# Altium PCB PCB1.PcbDoc (part 1 of 2)
Units mm, origin at the board's own origin, x right, y up, seen from the top; angles counter-clockwise.
Board outline 42.3 x 53.8 mm, 2 copper layers (Top Layer, Bottom Layer), stack 1.571 mm thick; 73 components, 29 nets, 129 pads, 33 vias.
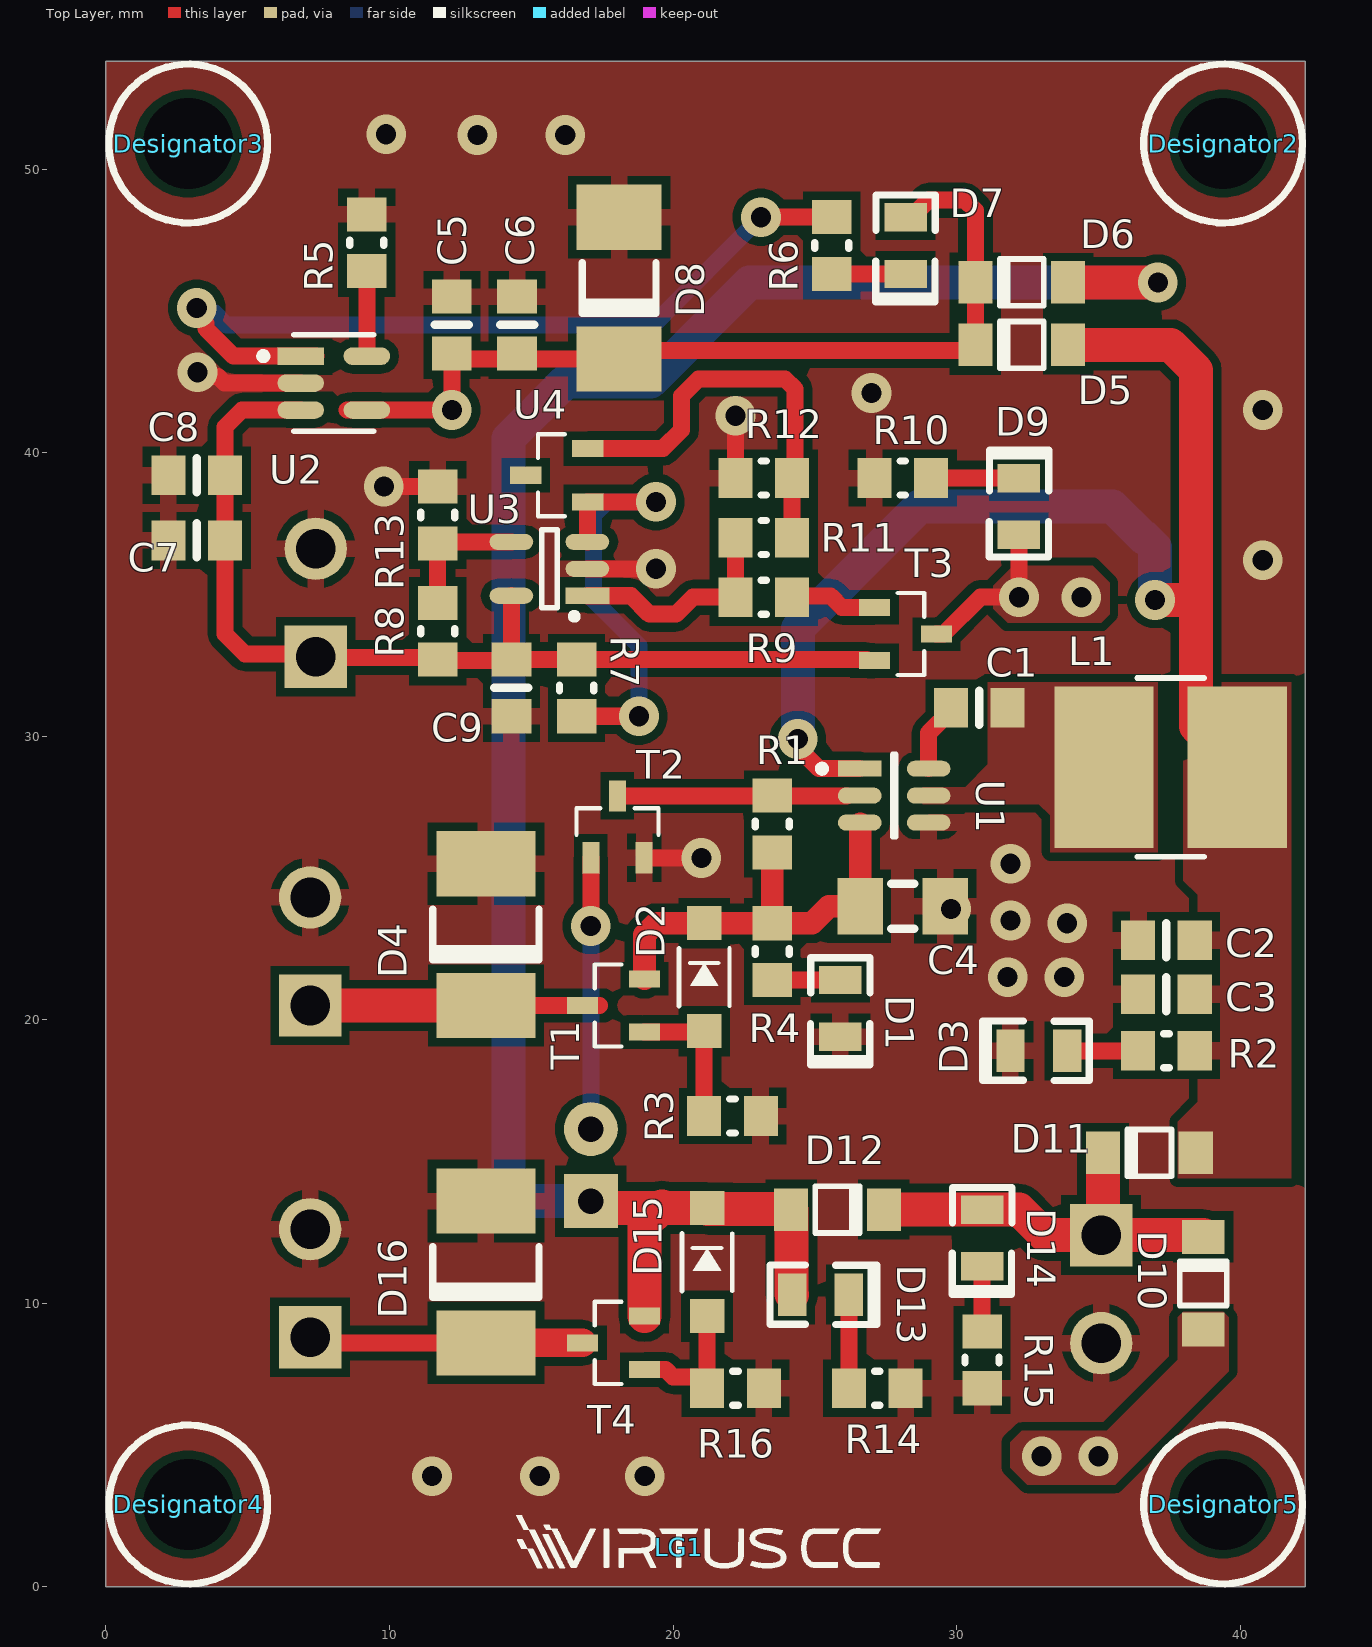
[diagram p0: Top Layer view]
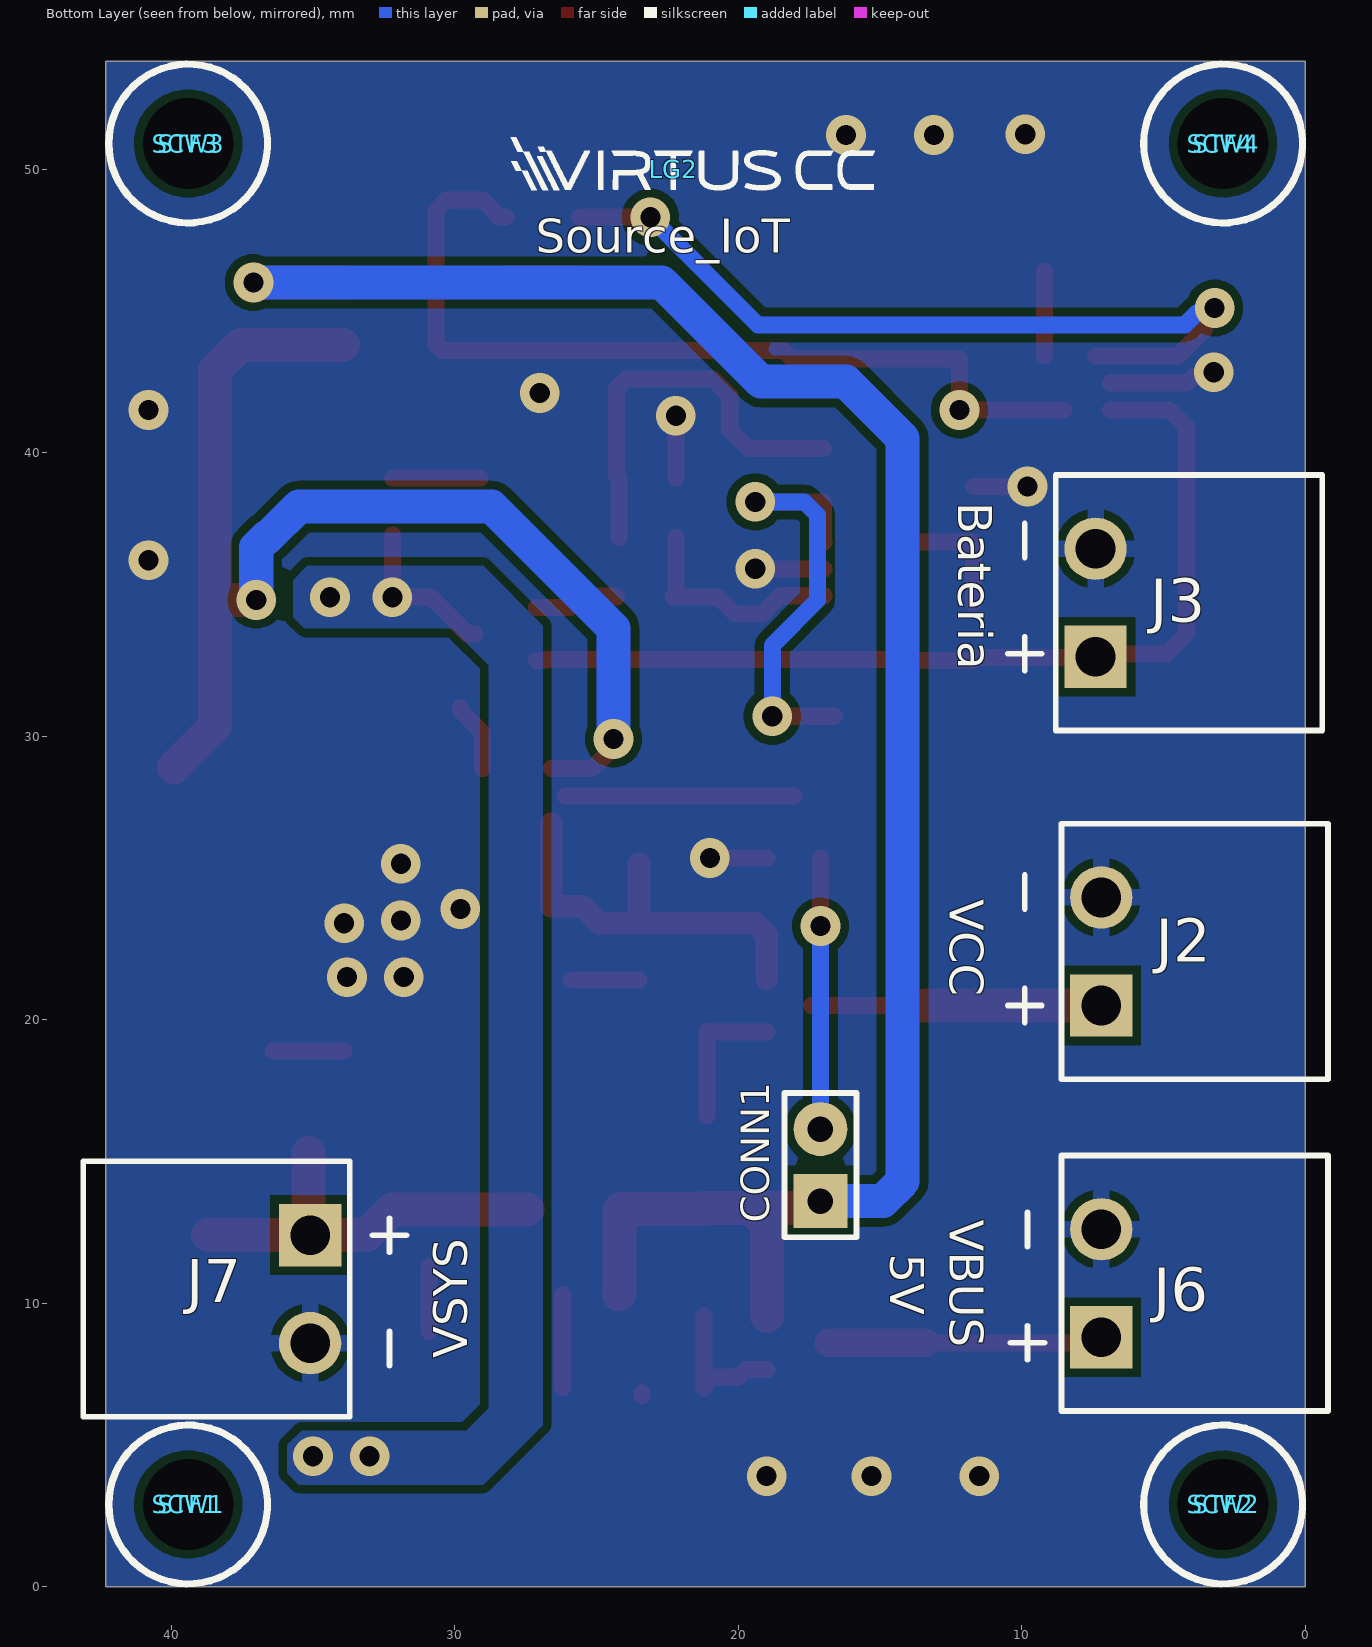
[diagram p1: Bottom Layer view, seen from below]
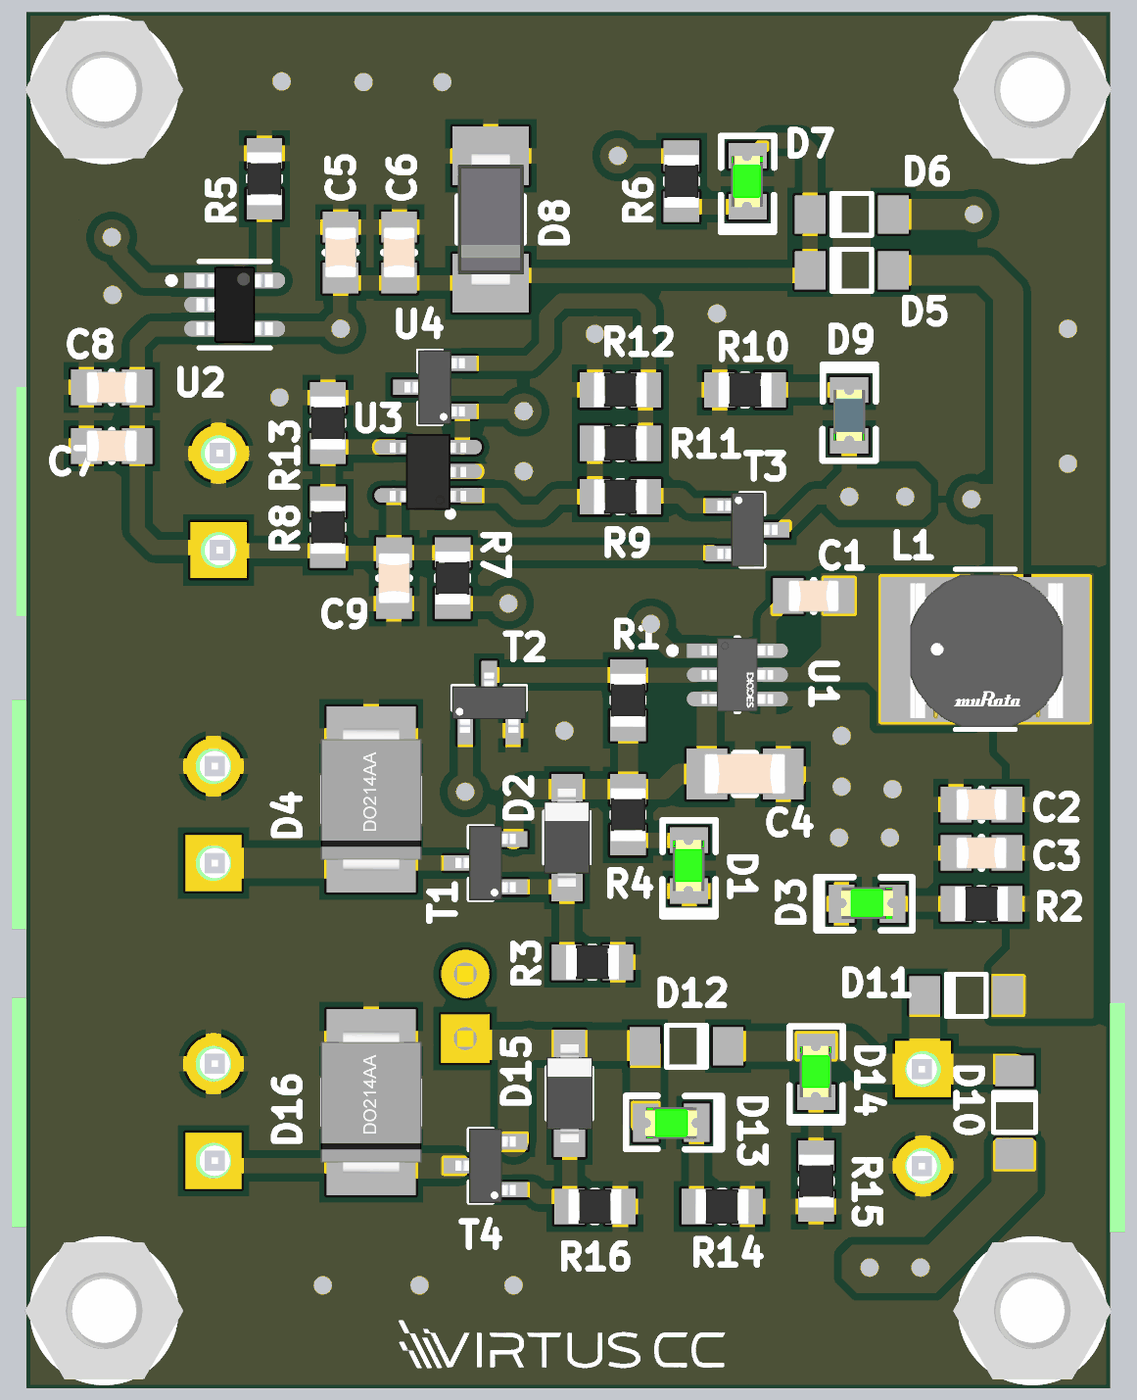
[diagram p2: 3D render of the assembled board from above, using the file's embedded part models]
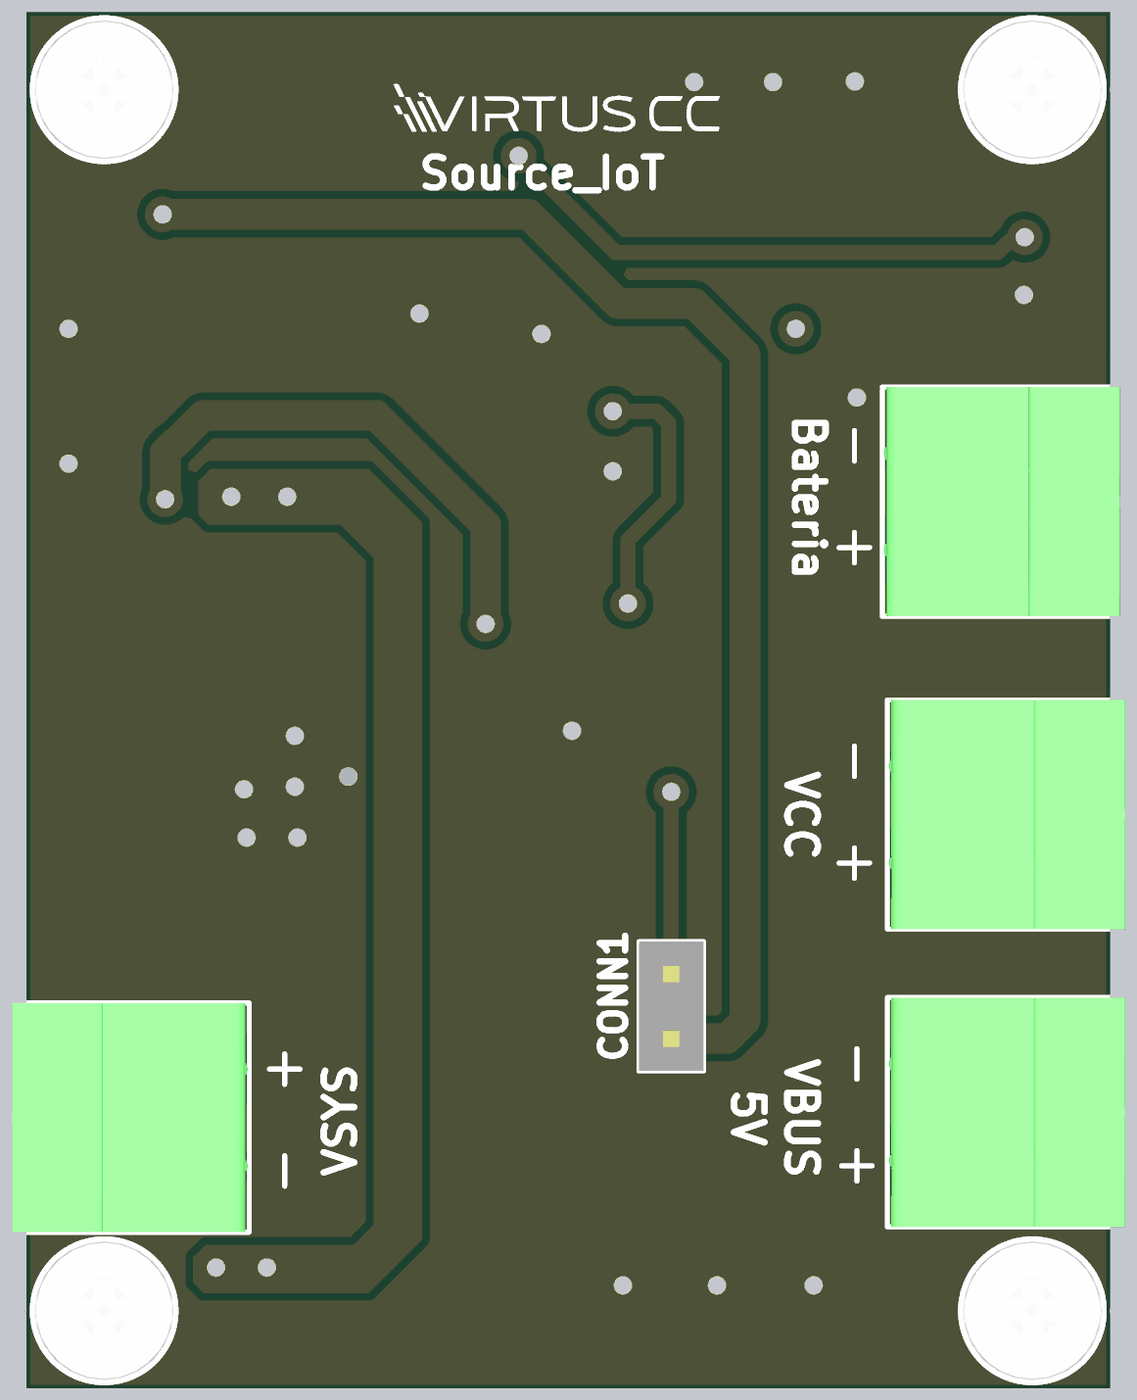
[diagram p3: 3D render of the assembled board from below, using the file's embedded part models]

## Layer stack, top to bottom
Top Solder: solder mask 0.0254, SM-003, Dk 4
Top Layer: signal copper 0.0356
Dielectric 1: dielectric 1.5, FR-4, Dk 4.8
Bottom Layer: signal copper 0.0356
Bottom Solder: solder mask 0.0254, SM-003, Dk 4

## Board outline
0,0 42.3,0 42.3,53.8 0,53.8

## Design rules (kind name [scope] priority, off if disabled: settings)
Clearance [All] p1: gap=0.3 ignorepadtopadclearanceinfootprint=FALSE
HoleSize [All] p1: absolutevalues=TRUE maxlimit=3.2 minlimit=0.025 maxpercent=80.000 minpercent=20.000
MinimumSolderMaskSliver [All] p1: minsoldermaskwidth=0.1
PolygonConnect PolygonConnect_3 [InNet('+3.7V')] p1: connectstyle=Direct reliefconductorwidth=0.254 reliefentries=4 polygonreliefangle="90 Angle" airgapwidth=0.254
PolygonConnect PolygonConnect_2 [HasFootprint('DG6045C','SOD-123F') vs InNet('+5V_Ext')] p2: connectstyle=Direct reliefconductorwidth=0.254 reliefentries=4 polygonreliefangle="90 Angle" airgapwidth=0.254
PolygonConnect PolygonConnect_1 [InNet('NetC1_2')] p3: connectstyle=Direct reliefconductorwidth=0.254 reliefentries=4 polygonreliefangle="90 Angle" airgapwidth=0.254
PolygonConnect [All] p4: thpad.connectstyle=Relief thpad.reliefconductorwidth=0.6 thpad.reliefentries=4 thpad.polygonreliefangle="90 Angle" thpad.airgapwidth=0.3 smdpad.connectstyle=Relief smdpad.reliefconductorwidth=0.6 smdpad.reliefentries=4 smdpad.polygonreliefangle="90 Angle" smdpad.airgapwidth=0.3 via.connectstyle=Direct via.reliefconductorwidth=0.6 via.reliefentries=4 via.polygonreliefangle="90 Angle" via.airgapwidth=0.3
RoutingVias [All] p1: holewidth=0.7 width=1.4 viastyle="Through Hole" minholewidth=0.7 minwidth=1.4 maxholewidth=0.7 maxwidth=1.4
SilkToSilkClearance [All] p1: silktosilkclearance=0.2
SilkToSolderMaskClearance [IsPad] p1: minsilkscreentomaskgap=0 clearancetoexposedcopper=TRUE
SolderMaskExpansion SolderMaskExpansion_1 [IsVia] p1: expansion=0.102 istentingtop=TRUE
SolderMaskExpansion [All] p2: expansion=0.102 istentingtop=FALSE
SupplyNets "Schematic Supply Nets_7" [InNet('GND')] p1: voltage=0.000
SupplyNets "Schematic Supply Nets_6" [InNet('+5V_USB')] p2: voltage=0.000
SupplyNets "Schematic Supply Nets_5" [InNet('VSYS')] p3: voltage=0.000
SupplyNets "Schematic Supply Nets_4" [InNet('+3.7V')] p4: voltage=0.000
SupplyNets "Schematic Supply Nets_3" [InNet('V_Battery')] p5: voltage=0.000
SupplyNets "Schematic Supply Nets_2" [InNet('VCC')] p6: voltage=0.000
SupplyNets "Schematic Supply Nets_1" [InNet('+5V_Ext')] p7: voltage=0.000
SupplyNets "Schematic Supply Nets" [InNet('VBUS')] p8: voltage=0.000
Width [All] p1: maxlimit=2 minlimit=0.3 preferedwidth=0.6
26 further rules are at their usual default settings.

## Classes and differential pairs
component class Mecânica: LG1 LG2 SCW1 SCW2 SCW3 SCW4 STF1 STF2 STF3 STF4

## Components (designator, comment, footprint, x,y, rotation, side; value= is the part's Value field where it differs from the comment)
C1 "CL21B104KACNNNC" C-0805 30.8,31 r0 top value=100nF
C2 "CL21A226MAYNNNE" C-0805 37.4,22.8 r180 top value=22uF
C3 "CL21A226MAYNNNE" C-0805 37.4,20.9 r180 top value=22uF
C4 "CL31A106KBHNNNE" C-1206 28.1,24 r0 top value=10uF
C5 "CL21B104KACNNNC" C-0805 12.2,44.5 r90 top value=100nF
C6 "C2012X5R1E475K125AB" C-0805 14.5,44.5 r90 top value=4.7uF
C7 "CL21B104KACNNNC" C-0805 3.2,36.9 r180 top value=100nF
C8 "C2012X5R1E475K125AB" C-0805 3.2,39.2 r180 top value=4.7uF
C9 "CL21B104KACNNNC" C-0805 14.3,31.7 r270 top value=100nF
CONN1 "TSW-101-07-G-D" HDR2X1 17.1,13.6 r90 bottom
D1 "LTST-C170GKT" 0805-LED-G 25.9,20.4 r90 top
D2 "MMSZ5245B-TP" SOD-123 21.1,21.5 r270 top
D3 "LTST-C170GKT" 0805-LED-G 32.9,18.9 r0 top
D4 "SMBJ28CAQ-13-F" DO-214AA 13.4,23 r90 top
D5 "MBR120VLSFT1G" SOD-123F 32.3,43.8 r0 top
D6 "MBR120VLSFT1G" SOD-123F 32.3,46 r0 top
D7 "LTST-C170GKT" 0805-LED-G 28.2,47.3 r90 top
D8 "SMAJ5.0A-13-F" DO-214AC 18.1,45.8 r90 top
D9 "LTST-C171TBKT" 0805-LED-B 32.2,38.1 r270 top
D10 "MBR120VLSFT1G" SOD-123F 38.7,10.7 r270 top
D11 "MBR120VLSFT1G" SOD-123F 36.8,15.3 r0 top
D12 "MBR120VLSFT1G" SOD-123F 25.8,13.3 r180 top
D13 "LTST-C170GKT" 0805-LED-G 25.2,10.3 r180 top
D14 "LTST-C170GKT" 0805-LED-G 30.9,12.3 r90 top
D15 "MMSZ5245B-TP" SOD-123 21.2,11.445 r270 top
D16 "SMBJ6.0CATR" DO-214AA 13.4,11.1 r90 top
Designator2 "Comment" HOLE_M3 39.4,50.9 r0 top
Designator3 "Comment" HOLE_M3 2.9,50.9 r0 top
Designator4 "Comment" HOLE_M3 2.9,2.9 r0 top
Designator5 "Comment" HOLE_M3 39.4,2.9 r0 top
J1 "5447861" 5447861 -18.6,18.2 r90 bottom
J2 "5444262" 5444262 7.2,20.5 r90 bottom
J3 "5444262" 5444262 7.4,32.8 r90 bottom
J4 "5447861" 5447861 -18.6,30.5 r90 bottom
J5 "5447861" 5447861 -18.6,6.5 r90 bottom
J6 "5444262" 5444262 7.2,8.8 r90 bottom
J7 "5444262" 5444262 35.1,12.4 r270 bottom
J8 "5447861" 5447861 60.3,14.7 r270 bottom
L1 "1255AY-4R7M=P3" DG6045C 37.55,28.9 r0 top value=4.7uH
LG1 "Logo_Virtus" Logo_VirtusCC 20.2,1.4 r0 top
LG2 "Logo_Virtus" Logo_VirtusCC 22.3,50 r180 bottom
R1 "CRGCQ0805F100K" R-0805 23.5,26.9 r270 top value=100kR
R2 "CRGCQ0805J470R" R-0805 37.4,18.9 r0 top value=470R
R3 "RC0805FR-0710KL" R-0805 22.1,16.6 r180 top value=10kR
R4 "RC0805FR-071KL" R-0805 23.5,22.4 r90 top value=1kR
R5 "ERJ-6ENF2001V" R-0805 9.2,47.4 r270 top value=2kR
R6 "CRGCQ0805J470R" R-0805 25.6,47.3 r270 top value=470R
R7 "RC0805FR-0710KL" R-0805 16.6,31.7 r270 top value=10kR
R8 "CRGCQ0805F100K" R-0805 11.7,33.7 r270 top value=100kR
R9 "RC0805FR-071ML" R-0805 23.2,34.9 r0 top value=1MR
R10 "CRGCQ0805J470R" R-0805 28.1,39.1 r180 top value=470R
R11 "RC0805FR-07270KL" R-0805 23.2,37 r180 top value=270kR
R12 "RC0805FR-0716KL" R-0805 23.2,39.1 r0 top value=16kR
R13 "RC0805FR-13330KL" R-0805 11.7,37.8 r270 top value=330kR
R14 "CRGCQ0805J470R" R-0805 27.2,7 r180 top value=470R
R15 "CRGCQ0805J470R" R-0805 30.9,8 r90 top value=470R
R16 "RC0805FR-0710KL" R-0805 22.2,7 r180 top value=10kR
SCW1 "SCREW_M3" SCREWM3 39.4,2.9 r180 bottom
SCW2 "SCREW_M3" SCREWM3 2.9,2.9 r180 bottom
SCW3 "SCREW_M3" SCREWM3 39.4,50.9 r180 bottom
SCW4 "SCREW_M3" SCREWM3 2.9,50.9 r180 bottom
STF1 "R30-1011502" R30-1011502 39.4,2.9 r180 bottom
STF2 "R30-1011502" R30-1011502 2.9,2.9 r180 bottom
STF3 "R30-1011502" R30-1011502 39.4,50.9 r180 bottom
STF4 "R30-1011502" R30-1011502 2.9,50.9 r180 bottom
T1 "DMP4065S-7" SOT23-3 17.9,20.5 r0 top
T2 "DDTC143ZCA-7-F" SOT23-3 18.04,26.8 r270 top
T3 "PJA3415_R1_00001" SOT23-3 28.2,33.6 r180 top
T4 "DMP4065S-7" SOT23-3 17.9,8.6 r0 top
U1 "AP63205WU-7" FP-TSOT26-IPC_A 27.8,27.9 r0 top
U2 "MCP73831T-2ACI/OT" SOT-23-5_A 8.034,42.45 r0 top
U3 "TLV7031QDBVRQ1" SOT-753 15.641,35.9 r180 top
U4 "LM4041DYM3-1.2-TR" SOT23-3 15.9,39.2 r0 top

## Footprints (in the part's own frame and the unit in brackets; to place one, negate y for a bottom-side part, rotate by r counter-clockwise, add the part's x,y. Pads: shape width x height; smd on the part's side, far side on the other; paste and mask are expansions set on the pad)
0805-LED-B [mm]
  rect 1x1.5 smd: 1(-1,0) 2(1,0)
  silkscreen extent -2.02,-1.05 1.78,1.05, body extent -1.01,-0.62 1.01,0.63, height 1.1
0805-LED-G [mm]
  rect 1x1.5 smd: 1(-1,0) 2(1,0)
  silkscreen extent -2.02,-1.05 1.78,1.05, body extent -1.01,-0.6 1.01,0.65, height 1.1
5444262 [mm]
  rect 2.2x2.2 hole 1.4: 1(0,0)
  round 2.2 hole 1.4: 2(3.81,0)
  silkscreen extent -2.6,-8 6.41,1.4, body extent -2.6,-7.95 6.41,1.34, height 7.25
5447861 [mm]
  body extent 0,0 8.41,16.1, height 7.7
C-0805 [mm]
  rect 1.2x1.4 smd: 1(-1,0) 2(1,0)
  silkscreen extent 0,-0.6 0,0.6, body extent -1,-0.63 1,0.63, height 0.81
C-1206 [mm]
  rect 1.6x2 smd: 1(-1.5,0) 2(1.5,0)
  silkscreen extent -0.4,-0.8 0.4,0.8, body extent -1.61,-0.79 1.59,0.81, height 1.16
DG6045C [mm]
  rect 3.5x5.7 smd: 1(-2.35,0) 2(2.35,0)
  silkscreen extent -1.17,-3.15 1.17,3.15, body extent -2.95,-3.05 3.05,2.95, height 4.5
DO-214AA [mm]
  rect 2.3x3.5 smd mask+0.1: 1(-2.5,0) 2(2.5,0)
  silkscreen extent -0.9,-2 0.9,2, body extent -2.79,-1.97 2.79,1.97, height 2.65
DO-214AC [mm]
  rect 2.3x3 smd mask+0.1: 1(-2.5,0) 2(2.5,0)
  silkscreen extent -0.9,-1.3 0.9,1.3, body extent -2.6,-1.3 2.6,1.3, height 2.4
FP-TSOT26-IPC_A [mm]
  rect 1.54x0.566 smd paste+0 mask+0: 1(-1.216,0.95)
  rrect100% 1.54x0.566 smd paste+0 mask+0: 2(-1.216,0) 3(-1.216,-0.95) 4(1.216,-0.95) 5(1.216,0) 6(1.216,0.95)
  silkscreen extent -2.67,-1.45 0.05,1.45, body extent -2.49,-1.95 2.49,1.95, height 0.25
HDR2X1 [mm]
  rect 1.9x1.9 hole 0.9: 1(0,0)
  round 1.9 hole 0.9: 2(2.54,0)
  silkscreen extent -1.27,-1.27 3.81,1.27, body extent -1.27,-1.27 3.81,1.27, height 8.38
HOLE_M3 [mm]
  round 0 hole 3.2: 1(0,0)
  silkscreen extent -2.8,-2.8 2.8,2.8
Logo_VirtusCC [mm]
  silkscreen extent -5.73,-0.75 7.12,1.13
R30-1011502 [mm]
  body extent -3.12,-2.7 3.12,2.7
R-0805 [mm]
  rect 1.2x1.4 smd: 1(-1,0) 2(1,0)
  silkscreen extent -0.1,-0.6 0.1,0.6, body extent -1.05,-0.67 1.05,0.68, height 0.6
SCREWM3 [mm]
  body extent -2.72,-2.73 2.72,2.73, height 1.72
SOD-123 [mm] "On Semi recommended land pattern"
  rect 1.2x1.22 smd: 1(-1.905,0) 2(1.905,0)
  silkscreen extent -1.02,-0.89 1.02,0.89, body extent -1.93,-0.9 1.93,0.9, height 1.35
SOD-123F [mm]
  rect 1.2x1.5 smd: 1(-1.635,0) 2(1.635,0)
  silkscreen extent -0.78,-0.82 0.78,0.82, body extent -1.9,-0.9 1.9,0.9, height 1.02
SOT23-3 [mm]
  rect 1.1x0.6 smd: 1(1.092,-0.94) 2(1.092,0.94) 3(-1.092,0)
  silkscreen extent -0.66,-1.45 0.28,1.45, body extent -1.18,-1.46 1.19,1.46, height 1.12
SOT-23-5_A [mil]
  rect 64.5x24.33 smd paste+0 mask+0: 1(-45.91,37.4)
  rrect100% 64.5x24.33 smd paste+0 mask+0: 2(-45.91,0) 3(-45.91,-37.4) 4(45.91,-37.4) 5(45.91,37.4)
  silkscreen extent -103,-67 55,67, body extent -59,-59 59,59, height 51
SOT-753 [mm]
  rect 1.54x0.566 smd: 1(-1.341,0.95)
  rrect100% 1.54x0.566 smd: 2(-1.341,0) 3(-1.341,-0.95) 4(1.341,-0.95) 5(1.341,0.95)
  silkscreen extent -0.98,-1.38 0.28,1.77, body extent -1.5,-1.47 1.5,1.53, height 1.46

## Part data
C1 C5 C7 C9: "CAP CER 0.1UF 25V X7R 0805", Case Code (Imperial)=0805, Case Code (Metric)=2012, Dielectric=X7R, Manufacturer=Samsung, Max Operating Temperature=125°C, Min Operating Temperature=-55°C, Package Quantity=1, Supplier Part Number=1276-1099-1-ND, Tolerance=10%, Voltage=25V, Case/Package=0805, Category="Ceramic Capacitors", ComponentLink1Description=https://datasheet.ciiva.com/25801/cl21b104kacnnnc-25801824.pdf?src-supplier=Digikey, ComponentLink1URL=https://datasheet.ciiva.com/25801/cl21b104kacnnnc-25801824.pdf?src-supplier=Digikey, ComponentLink2Description=https://datasheet.ciiva.com/15216/getdatasheetpartid-355204-15216236.pdf?src-supplier=Verical, ComponentLink2URL=https://datasheet.ciiva.com/15216/getdatasheetpartid-355204-15216236.pdf?src-supplier=Verical, Construction=Flat, Depth=1.25mm, Height=0.85mm, Length=2mm, Manufacturer Part Number=CL21B104KACNNNC, Material=Ceramic, Mounting Technology="Surface Mount", Packaging="Tape and Reel", Pricing="1=0,08, 10=0,006, 50=0,006, 100=0,0056 (USD)", Radiation Hardening=No, RoHS=Yes, RoHS Compliant=Yes, Series=CL, Stock=67422, Supplier=Digikey, Supplier 1=Digikey, Supplier 2=Mouser, Supplier Part Number 1=1276-1099-1-ND, Supplier Part Number 2=187-CL21B104KACNNNC, Thickness=0.037inch, Voltage Rating=25V, Voltage Rating (DC)=25V, Width=0.049inch
C2 C3: "CAP CER 22UF 25V X5R 0805", Case/Package=0805, Dielectric=X5R, Manufacturer=Samsung, Max Operating Temperature=85°C, Min Operating Temperature=-55°C, Supplier Part Number=1276-CL21A226MAYNNNECT-ND, Tolerance=20%, Voltage Rating=25V, Category="Ceramic Capacitors", ComponentLink1Description=https://datasheet.octopart.com/CL21A226MAYNNNE-Samsung-Electro-Mechanics-datasheet-149154243.pdf?src-supplier=Future+Electronics, ComponentLink1URL=https://datasheet.octopart.com/CL21A226MAYNNNE-Samsung-Electro-Mechanics-datasheet-149154243.pdf?src-supplier=Future+Electronics, ComponentLink2Description=https://datasheet.octopart.com/CL21A226MAYNNNE-Samsung-Electro-Mechanics-datasheet-137126787.pdf?src-supplier=Newark, ComponentLink2URL=https://datasheet.octopart.com/CL21A226MAYNNNE-Samsung-Electro-Mechanics-datasheet-137126787.pdf?src-supplier=Newark, ComponentLink3Description=https://datasheet.octopart.com/CL21A226MAYNNNE-Samsung-datasheet-8326407.pdf?src-supplier=TME, ComponentLink3URL=https://datasheet.octopart.com/CL21A226MAYNNNE-Samsung-datasheet-8326407.pdf?src-supplier=TME, Height=1.45mm, Manufacturer Part Number=CL21A226MAYNNNE, Material=4241ConductorMaterial, Pricing="1=0,11, 10=0,064, 50=0,0532, 100=0,0429 (USD)", RoHS=Yes, RoHS Compliant=Yes, Stock=1376374, Supplier=Digikey, Supplier 1=Digikey, Supplier 2=Mouser, Supplier Part Number 1=1276-CL21A226MAYNNNECT-ND, Supplier Part Number 2=187-CL21A226MAYNNNE, Voltage Rating (DC)=25V
C4: "CAP CER 10UF 50V X5R 1206", Case Code (Imperial)=1206, Case Code (Metric)=3216, Dielectric=X5R, Manufacturer=Samsung, Max Operating Temperature=85°C, Min Operating Temperature=-55°C, Package Quantity=1, Supplier Part Number=1276-2876-1-ND, Tolerance=10%, Voltage Rating=50V, Case/Package=1206, Category="Ceramic Capacitors", ComponentLink1Description=https://datasheet.ciiva.com/25726/cl31a106kbhnnne-25726404.pdf?src-supplier=Digikey, ComponentLink1URL=https://datasheet.ciiva.com/25726/cl31a106kbhnnne-25726404.pdf?src-supplier=Digikey, ComponentLink2Description=https://datasheet.ciiva.com/15216/getdatasheetpartid-353196-15216238.pdf?src-supplier=Verical, ComponentLink2URL=https://datasheet.ciiva.com/15216/getdatasheetpartid-353196-15216238.pdf?src-supplier=Verical, ComponentLink3Description=https://datasheet.ciiva.com/29201/452492-da-01-en-vs-kondensator-1206-29201107.pdf?src-supplier=Conrad, ComponentLink3URL=https://datasheet.ciiva.com/29201/452492-da-01-en-vs-kondensator-1206-29201107.pdf?src-supplier=Conrad, ComponentLink4Description=https://datasheet.ciiva.com/16437/cl05b104kq5nnnc-16437222.pdf?src-supplier=Future+Electronics, ComponentLink4URL=https://datasheet.ciiva.com/16437/cl05b104kq5nnnc-16437222.pdf?src-supplier=Future+Electronics, Construction=Flat, Depth=1.6mm, Height=1.6mm, Lead Free="Lead Free", Length=3.2mm, Manufacturer Part Number=CL31A106KBHNNNE, Material=Ceramic, Mounting Technology="Surface Mount", Packaging="Tape and Reel", Pricing="1=0,09, 10=0,07 (USD)", Radiation Hardening=No, RoHS=Yes, RoHS Compliant=Yes, Series=CL, Stock=257819, Supplier=Digikey, Supplier 1=Digikey, Supplier 2=Mouser, Supplier Part Number 1=1276-2876-1-ND, Supplier Part Number 2=187-CL31A106KBHNNNE, Thickness=0.071inch, Voltage Rating (DC)=50V, Width=0.063inch
C6 C8: "CAP CER 4.7UF 25V X5R 0805", Case Code (Imperial)=0805, Case Code (Metric)=2012, Dielectric=X5R, Dielectric Material=Ceramic, Manufacturer=TDK, Max Operating Temperature=85°C, Min Operating Temperature=-55°C, Package Quantity=2000, Supplier Part Number=445-4116-1-ND, Tolerance=10%, Voltage=25V, Case/Package=0805, Category="Ceramic Capacitors", ComponentLink1Description=https://datasheet.ciiva.com/24216/tdkmlcccaprange-24216480.pdf?src-supplier=Mouser, ComponentLink1URL=https://datasheet.ciiva.com/24216/tdkmlcccaprange-24216480.pdf?src-supplier=Mouser, ComponentLink2Description=https://datasheet.ciiva.com/11788/0900766b80c1bb00-11788107.pdf?src-supplier=Rs, ComponentLink2URL=https://datasheet.ciiva.com/11788/0900766b80c1bb00-11788107.pdf?src-supplier=Rs, ComponentLink3Description=https://datasheet.ciiva.com/6251/tdkmlcccaprange-6251817.pdf?src-supplier=Digikey, ComponentLink3URL=https://datasheet.ciiva.com/6251/tdkmlcccaprange-6251817.pdf?src-supplier=Digikey, ComponentLink4Description=https://datasheet.ciiva.com/6251/tdkmlcccaprange-6251820.pdf?src-supplier=Digikey, ComponentLink4URL=https://datasheet.ciiva.com/6251/tdkmlcccaprange-6251820.pdf?src-supplier=Digikey, ComponentLink5Description=https://datasheet.ciiva.com/6251/tdkmlcccaprange-6251823.pdf?src-supplier=Digikey, ComponentLink5URL=https://datasheet.ciiva.com/6251/tdkmlcccaprange-6251823.pdf?src-supplier=Digikey, ComponentLink6Description=https://datasheet.ciiva.com/28602/1744655-28602173.pdf?src-supplier=Element14, ComponentLink6URL=https://datasheet.ciiva.com/28602/1744655-28602173.pdf?src-supplier=Element14, ComponentLink7Description=https://datasheet.ciiva.com/36857/1796654-36857301.pdf?src-supplier=Element14, ComponentLink7URL=https://datasheet.ciiva.com/36857/1796654-36857301.pdf?src-supplier=Element14, ComponentLink8Description=https://datasheet.ciiva.com/16449/e412-c-16449599.pdf?src-supplier=Future+Electronics, ComponentLink8URL=https://datasheet.ciiva.com/16449/e412-c-16449599.pdf?src-supplier=Future+Electronics, Construction=Flat, Depth=1.25mm, Height=1.25mm, Lead Free="Lead Free", Length=2mm, Manufacturer Part Number=C2012X5R1E475K125AB, Material=Ceramic, Mounting Technology="Surface Mount", Packaging="Tape and Reel", Pins=2, Pricing="1=0,25, 10=0,147, 50=0,1058, 100=0,0934, 500=0,07234, 1000=0,06585 (USD)", Reach SVHC Compliant=No, RoHS=Yes, RoHS Compliant=Yes, Series=C, Stock=1900814, Supplier=Digikey, Supplier 1=Digikey, Supplier 2=Mouser, Supplier Part Number 1=445-4116-1-ND, Supplier Part Number 2=810-C2012X5R1E475K, Termination=SMD/SMT, Voltage Rating=25V, Voltage Rating (DC)=25V, Weight=0.000194oz, Width=1.25mm
CONN1: "CONN HEADER VERT 2POS", Flammability Rating="UL94 V-0", Housing Color=Black, Manufacturer=Samtec, Max Current Rating=7.6A, Max Operating Temperature=125°C, Max Voltage Rating (AC)=550V, Min Operating Temperature=-55°C, Supplier Part Number=SAM1028-01-ND, Category=Connectors, ComponentLink1Description=https://datasheet.ciiva.com/6861/tsw-xxx-xx-xxx-x-xx-xxx-mkt-6861372.pdf?src-supplier=Digikey, ComponentLink1URL=https://datasheet.ciiva.com/6861/tsw-xxx-xx-xxx-x-xx-xxx-mkt-6861372.pdf?src-supplier=Digikey, ComponentLink2Description=https://datasheet.ciiva.com/48561/htsw-th-48561486.pdf?src-supplier=Avnet, ComponentLink2URL=https://datasheet.ciiva.com/48561/htsw-th-48561486.pdf?src-supplier=Avnet, Connector Type=Header, Contact Finish - Mating=GOLD, Contact Material=Bronze, Contact Plating=Gold, Contact Shape=Square, Contact Type="Male Pin", Depth=5.08mm, Fastening Type=Pull, Gender=Male, Housing Material=Polyester, Insulation Color=Black, Insulation Material=PBT, Lead Free="Lead Free", Length=2.54mm, Manufacturer Part Number=TSW-101-07-G-D, Mounting Technology="Through Hole", Number of Contacts=2, Number of Positions=2, Number of Rows=2, Orientation=Straight, Packaging=Bulk, Pricing="1=0,45, 10=0,386, 100=0,3282, 500=0,29288, 1000=0,27889, 5000=0,25057 (USD)", Reach SVHC Compliant=No, RoHS=Yes, RoHS Compliant=Yes, Series=TSW, Stock=2715, Supplier=Digikey, Supplier 1=Digikey, Supplier 2=Mouser, Supplier Part Number 1=SAM1028-01-ND, Supplier Part Number 2=200-TSW10107GD, Termination=Solder, Width=5.08mm
D1 D3 D7 D13 D14: "LED GREEN CLEAR SMD", Case Code (Imperial)=0805, Case Code (Metric)=2012, Color=Green, Forward Current=30mA, Forward Voltage=2.1V, JLCPCB Part=C125090, Lens Color=Colorless, Manufacturer="Vishay Lite-On", Max Operating Temperature=85°C, Min Operating Temperature=-55°C, Package Quantity=1, Power Dissipation=100mW, Reverse Voltage=5V, Supplier Part Number 1=160-1179-1-ND, Test Current=10mA, Case/Package=0805, Category=LEDs, ComponentLink1Description=https://datasheet.ciiva.com/2110/ltst-c170gkt-2110128.pdf?src-supplier=Digi-Key, ComponentLink1URL=https://datasheet.ciiva.com/2110/ltst-c170gkt-2110128.pdf?src-supplier=Digi-Key, ComponentLink2Description=https://datasheet.ciiva.com/11773/0900766b80dc0278-11773630.pdf?src-supplier=RSComponents, ComponentLink2URL=https://datasheet.ciiva.com/11773/0900766b80dc0278-11773630.pdf?src-supplier=RSComponents, ComponentLink3Description=https://datasheet.ciiva.com/12400/lite-on-ltst-c170gkt-187191-12400783.pdf?src-supplier=Mouser, ComponentLink3URL=https://datasheet.ciiva.com/12400/lite-on-ltst-c170gkt-187191-12400783.pdf?src-supplier=Mouser, ComponentLink4Description=https://datasheet.ciiva.com/15117/getdatasheetpartid-142079-15117738.pdf?src-supplier=Verical, ComponentLink4URL=https://datasheet.ciiva.com/15117/getdatasheetpartid-142079-15117738.pdf?src-supplier=Verical, ComponentLink5Description=https://datasheet.ciiva.com/25772/ltst-c170gkt-25772881.pdf?src-supplier=Allied+Electronics, ComponentLink5URL=https://datasheet.ciiva.com/25772/ltst-c170gkt-25772881.pdf?src-supplier=Allied+Electronics, ComponentLink6Description=https://datasheet.ciiva.com/16387/ltst-c170gkt-16387357.pdf?src-supplier=Future+Electronics, ComponentLink6URL=https://datasheet.ciiva.com/16387/ltst-c170gkt-16387357.pdf?src-supplier=Future+Electronics, Depth=1.25mm, Dominant Wavelength=569nm, Height=1.1mm, Illumination Color=Green, Lead Free="Lead Free", Length=2mm, Lens Style=Diffused,Colorless,Rectangular, Lens Transparency=Clear, Luminous Intensity=6mcd, Manufacturer Part Number=LTST-C170GKT, Mount="Surface Mount", Number of Elements=1, Number of LEDs=1, Number of Pins=2, Packaging="Tape and Reel", Power Rating=100mW, Pricing 1="1=0,30000, 10=0,16000, 100=0,07440, 500=0,06870, 1000=0,05382 (USD)", Radiation Hardening=No, RoHS=Yes, RoHS Compliant=Yes, Series="CHIPLED 0805", Stock 1=753504, Supplier 1=Digi-Key, Supplier 2=Mouser, Supplier Part Number 2=859-LTST-C170GKT, Viewing Angle=130°, Voltage=5V, Wavelength=565nm, Width=1.25mm
D2 D15: "DIODE ZENER 15V 500MW SOD123", Manufacturer=MCC, Max Operating Temperature=150°C, Max Power Dissipation=500mW, Max Reverse Leakage Current=100nA, Min Operating Temperature=-55°C, Package Quantity=1, Supplier Part Number 1=MMSZ5245B-TPMSCT-ND, Test Current=8.5mA, Tolerance=5%, Zener Voltage=15V, Category="Zener Diodes", ComponentLink1Description=https://datasheet.ciiva.com/890/mmsz5221-mmsz5259sod123-890445.pdf?src-supplier=Digi-Key, ComponentLink1URL=https://datasheet.ciiva.com/890/mmsz5221-mmsz5259sod123-890445.pdf?src-supplier=Digi-Key, ComponentLink2Description=https://datasheet.ciiva.com/890/mmsz5221-mmsz5259sod123-890446.pdf?src-supplier=Digi-Key, ComponentLink2URL=https://datasheet.ciiva.com/890/mmsz5221-mmsz5259sod123-890446.pdf?src-supplier=Digi-Key, ComponentLink3Description=https://datasheet.ciiva.com/890/mmsz5221-mmsz5259sod123-890447.pdf?src-supplier=Digi-Key, ComponentLink3URL=https://datasheet.ciiva.com/890/mmsz5221-mmsz5259sod123-890447.pdf?src-supplier=Digi-Key, Element Configuration=Single, Impedance=16R, Lead Free="Lead Free", Manufacturer Part Number=MMSZ5245B-TP, Mount="Surface Mount", Number of Pins=2, Packaging="Tape and Reel", Power Dissipation=500mW, Pricing 1="1=0,22000, 10=0,17700, 100=0,09400, 500=0,06188, 1000=0,04208 (USD)", RoHS=Yes, Series=-, Stock 1=330368, Supplier 1=Digi-Key, Supplier 2=Mouser, Supplier 3="Arrow Electronics", Supplier Part Number 2=833-MMSZ5245B-TP, Supplier Part Number 3=MMSZ5245B-TP, Voltage Tolerance=5%
D4: "TVS DIODE 28VWM 45.4VC SMB", Case/Package=SMB, Clamping Voltage=45.4V, Manufacturer=Diodes, Max Operating Temperature=150°C, Min Breakdown Voltage=31.1V, Min Operating Temperature=-55°C, Peak Pulse Current=13.2A, Peak Pulse Power=600W, Power Line Protection=No, Resistor Type=Zener, Reverse Standoff Voltage=28V, Supplier Part Number 1=SMBJ28CAQ-13-FDICT-ND, Category="TVS Diodes", ComponentLink1Description=https://www.diodes.com/assets/Datasheets/ds40740.pdf?src-supplier=Digi-Key, ComponentLink1URL=https://www.diodes.com/assets/Datasheets/ds40740.pdf?src-supplier=Digi-Key, Manufacturer Part Number=SMBJ28CAQ-13-F, Mount="Surface Mount", Number of Bidirectional Channels=1, Packaging="Tape and Reel", Pricing 1="1=0,44000, 10=0,37900, 100=0,28310, 500=0,22240, 1000=0,17185 (USD)", RoHS=Yes, RoHS Compliant=Yes, Stock 1=16278, Supplier 1=Digi-Key, Supplier 2=Mouser, Supplier Part Number 2=621-SMBJ28CAQ-13-F
D5 D6 D10 D11 D12: "DIODE SCHOTTKY 20V 1A SOD123FL", Average Rectified Current=1A, Forward Voltage=340mV, Manufacturer="ON Semiconductor", Max Forward Surge Current (Ifsm)=45A, Max Operating Temperature=125°C, Max Repetitive Reverse Voltage (Vrrm)=20V, Max Reverse Current=600uA, Min Operating Temperature=-65°C, Package Quantity=3000, Supplier Part Number=MBR120VLSFT1GOSCT-ND, Category="Schottky Diodes", ComponentLink1Description=https://datasheet.ciiva.com/7962/85900-7962720.pdf?src-supplier=Element14, ComponentLink1URL=https://datasheet.ciiva.com/7962/85900-7962720.pdf?src-supplier=Element14, ComponentLink2Description=https://datasheet.ciiva.com/915/mbr120vlsft1-d-915659.pdf?src-supplier=Digikey, ComponentLink2URL=https://datasheet.ciiva.com/915/mbr120vlsft1-d-915659.pdf?src-supplier=Digikey, ComponentLink3Description=https://datasheet.ciiva.com/915/mbr120vlsft1-d-915660.pdf?src-supplier=Digikey, ComponentLink3URL=https://datasheet.ciiva.com/915/mbr120vlsft1-d-915660.pdf?src-supplier=Digikey, ComponentLink4Description=https://datasheet.ciiva.com/18435/70100467-18435526.pdf?src-supplier=Allied+Electronics, ComponentLink4URL=https://datasheet.ciiva.com/18435/70100467-18435526.pdf?src-supplier=Allied+Electronics, ComponentLink5Description=https://datasheet.ciiva.com/16392/mbr120vlsft1-d-16392906.pdf?src-supplier=Future+Electronics, ComponentLink5URL=https://datasheet.ciiva.com/16392/mbr120vlsft1-d-16392906.pdf?src-supplier=Future+Electronics, Current Rating=1A, Element Configuration=Single, Forward Current=1A, Halogen Free="Halogen Free", Height=0.035inch, Lead Free="Lead Free", Length=0.114inch, Manufacturer Part Number=MBR120VLSFT1G, Max Reverse Leakage Current=600uA, Max Reverse Voltage (DC)=20V, Max Surge Current=45A, Output Current=1A, Packaging="Tape and Reel", Peak Non-Repetitive Surge Current=45A, Pins=2, Polarity=Standard, Pricing="1=0,56, 10=0,348, 100=0,2217, 500=0,16708, 1000=0,14944 (USD)", Radiation Hardening=No, Reach SVHC Compliant=No, RoHS=Yes, RoHS Compliant=Yes, Series=-, Stock=20847, Supplier=Digikey, Supplier 1=Digikey, Supplier 2=Mouser, Supplier Part Number 1=MBR120VLSFT1GOSCT-ND, Supplier Part Number 2=863-MBR120VLSFT1G, Voltage Rating (DC)=20V, Width=0.071inch
D8: "TVS DIODE 5VWM 9.2VC SMA", Breakdown Voltage=6.4V, Capacitance=2nF, Case/Package=SMA, Clamping Voltage=9.2V, Forward Voltage=3.5V, JLCPCB Part=C87074, Leakage Current=800uA, Manufacturer=Diodes, Max Breakdown Voltage=7.25V, Max Operating Temperature=150°C, Max Output Current=43.5A, Max Power Dissipation=400W, Max Surge Current=40A, Min Operating Temperature=-55°C, Package Quantity=5000, Power Line Protection=No, Resistor Type=Zener, Reverse Standoff Voltage=5V, Supplier Part Number 1=SMAJ5.0A-FDICT-ND, Test Current=10mA, Category="TVS Diodes", Clamping Voltage-Max=9.2V, ComponentLink1Description=https://datasheet.ciiva.com/27052/1542127-27052431.pdf?src-supplier=Jameco, ComponentLink1URL=https://datasheet.ciiva.com/27052/1542127-27052431.pdf?src-supplier=Jameco, ComponentLink2Description=https://datasheet.ciiva.com/22696/1670961-22696859.pdf?src-supplier=Element14, ComponentLink2URL=https://datasheet.ciiva.com/22696/1670961-22696859.pdf?src-supplier=Element14, ComponentLink3Description=https://datasheet.ciiva.com/26933/getdatasheetpartid-35116-26933158.pdf?src-supplier=Verical, ComponentLink3URL=https://datasheet.ciiva.com/26933/getdatasheetpartid-35116-26933158.pdf?src-supplier=Verical, Contact Plating=Tin,Matte, Diode Type=ZENER, Direction=Unidirectional, Element Configuration=Single, ESD Protection=No, Height=2.1mm, Lead Free="Lead Free", Length=4.6mm, Manufacturer Part Number=SMAJ5.0A-13-F, Max Reverse Leakage Current=800uA, Min Breakdown Voltage=6.4V, Mount="Surface Mount", Number of Elements=1, Number of Pins=2, Number of Unidirectional Channels=1, Packaging="Tape and Reel", Peak Pulse Current=43.5A, Peak Pulse Power=400W, Polarity=Unidirectional, Power Dissipation=400W, Pricing 1="1=0,42000, 10=0,31700, 100=0,19770, 500=0,13528, 1000=0,10406, 2000=0,09366 (USD)", Radiation Hardening=No, REACH SVHC="No SVHC", Reverse Breakdown Voltage=6.4V, RoHS=Yes, RoHS Compliant=Yes, Series=-, Stock 1=435542, Supplier 1=Digi-Key, Supplier 2=Mouser, Supplier 3="Arrow Electronics", Supplier 4=Digi-Key, Supplier 5=Mouser, Supplier 6=Digi-Key, Supplier 7=Mouser, Supplier Part Number 2=621-SMAJ5.0A-13-F, Supplier Part Number 3=SMAJ5.0A-13-F, Supplier Part Number 4=SMAJ5.0A-E3/61GICT-ND, Supplier Part Number 5=625-SMAJ5.0A-E3, Supplier Part Number 6=F11528CT-ND, Supplier Part Number 7=863-SZ1SMA5.0AT3G, Termination=SMD/SMT, Voltage Rating (DC)=5V, Width=2.92mm, Working Voltage=5V
D9: "LED BLUE CLEAR CHIP SMD", Case Code (Imperial)=0805, Case Code (Metric)=2012, Color=Blue, Forward Current=20mA, Forward Voltage=3.8V, JLCPCB Part=C98225, Lens Color=Colorless, Manufacturer="Vishay Lite-On", Max Operating Temperature=80°C, Min Operating Temperature=-20°C, Package Quantity=1, Power Dissipation=76mW, Reverse Voltage=5V, Supplier Part Number 1=160-1645-1-ND, Case/Package=0805, Category=LEDs, ComponentLink1Description=https://datasheet.ciiva.com/2110/ltst-c171tbkt-2110304.pdf?src-supplier=Digi-Key, ComponentLink1URL=https://datasheet.ciiva.com/2110/ltst-c171tbkt-2110304.pdf?src-supplier=Digi-Key, ComponentLink2Description=https://datasheet.ciiva.com/11774/0900766b80dc029b-11774836.pdf?src-supplier=RSComponents, ComponentLink2URL=https://datasheet.ciiva.com/11774/0900766b80dc029b-11774836.pdf?src-supplier=RSComponents, ComponentLink3Description=https://datasheet.ciiva.com/12403/lite-on-ltst-c171tbkt-187246-12403800.pdf?src-supplier=Mouser, ComponentLink3URL=https://datasheet.ciiva.com/12403/lite-on-ltst-c171tbkt-187246-12403800.pdf?src-supplier=Mouser, ComponentLink4Description=https://datasheet.ciiva.com/15118/getdatasheetpartid-225754-15118121.pdf?src-supplier=Verical, ComponentLink4URL=https://datasheet.ciiva.com/15118/getdatasheetpartid-225754-15118121.pdf?src-supplier=Verical, ComponentLink5Description=https://datasheet.ciiva.com/2110/s-110-ltst-c171tbkt0630-2110305.pdf?src-supplier=Digi-Key, ComponentLink5URL=https://datasheet.ciiva.com/2110/s-110-ltst-c171tbkt0630-2110305.pdf?src-supplier=Digi-Key, ComponentLink6Description=https://datasheet.ciiva.com/16444/lite-onltst-c171tbkt-16444780.pdf?src-supplier=Future+Electronics, ComponentLink6URL=https://datasheet.ciiva.com/16444/lite-onltst-c171tbkt-16444780.pdf?src-supplier=Future+Electronics, Depth=1.25mm, Dominant Wavelength=475nm, Height=0.8mm, Illumination Color=Blue, Lead Free="Lead Free", Length=2mm, Lens Style=Diffused,Colorless,Rectangular,Clear, Lens Transparency=Clear, Luminous Intensity=180mcd, Manufacturer Part Number=LTST-C171TBKT, Mount="Surface Mount", Number of Elements=1, Number of LEDs=1, Number of Pins=2, Packaging="Tape and Reel", Pricing 1="1=0,32000, 10=0,25100, 100=0,11280, 500=0,10192, 1000=0,08372 (USD)", Radiation Hardening=No, RoHS=Yes, RoHS Compliant=Yes, Series="CHIPLED 0805", Stock 1=433320, Supplier 1=Digikey, Supplier 2=Mouser, Supplier Part Number 2=859-LTST-C171TBKT, Test Current=20mA, Viewing Angle=130°, Wavelength=468nm, Width=1.25mm
D16: library part SMBJ6.0CA-TR, "TVS DIODE 6VWM 10.3VC SMB", Breakdown Voltage=6.7V, Capacitance=3.85nF, Case/Package=DO-214AA, Clamping Voltage=13.7V, Leakage Current=20uA, Manufacturer=STMicroelectronics, Max Breakdown Voltage=7.05V, Max Operating Temperature=150°C, Max Surge Current=10mA, Min Operating Temperature=-55°C, Operating Supply Voltage=6V, Package Quantity=1, Peak Pulse Current=290A, Peak Pulse Power=600W, Power Line Protection=No, Resistor Type=Zener, Supplier Part Number 1=497-7454-1-ND, Category=Diodes, Clamping Voltage-Max=13.7V, ComponentLink1Description=https://datasheet.ciiva.com/15143/getdatasheetpartid-64868-15143186.pdf?src-supplier=Verical, ComponentLink1URL=https://datasheet.ciiva.com/15143/getdatasheetpartid-64868-15143186.pdf?src-supplier=Verical, ComponentLink2Description=https://datasheet.ciiva.com/7973/1761316-7973591.pdf?src-supplier=Element14, ComponentLink2URL=https://datasheet.ciiva.com/7973/1761316-7973591.pdf?src-supplier=Element14, ComponentLink3Description=https://datasheet.ciiva.com/337/cd00001366-337980.pdf?src-supplier=Digi-Key, ComponentLink3URL=https://datasheet.ciiva.com/337/cd00001366-337980.pdf?src-supplier=Digi-Key, ComponentLink4Description=https://datasheet.ciiva.com/337/cd00001366-337979.pdf?src-supplier=Digi-Key, ComponentLink4URL=https://datasheet.ciiva.com/337/cd00001366-337979.pdf?src-supplier=Digi-Key, ComponentLink5Description=https://datasheet.ciiva.com/337/cd00001366-337981.pdf?src-supplier=Digi-Key, ComponentLink5URL=https://datasheet.ciiva.com/337/cd00001366-337981.pdf?src-supplier=Digi-Key, ComponentLink6Description=https://datasheet.ciiva.com/7973/1761316-7973594.pdf?src-supplier=Element14, ComponentLink6URL=https://datasheet.ciiva.com/7973/1761316-7973594.pdf?src-supplier=Element14, ComponentLink7Description=https://datasheet.ciiva.com/41443/001184246-da-01-en-transil-600w-6-smbj6-0ca-tr-do-214aa-stm-41443708.pdf?src-supplier=Conrad, ComponentLink7URL=https://datasheet.ciiva.com/41443/001184246-da-01-en-transil-600w-6-smbj6-0ca-tr-do-214aa-stm-41443708.pdf?src-supplier=Conrad, Diode Type=ZENER, Direction=Bidirectional, Element Configuration=Single, Height=2.45mm, Lead Free="Lead Free", Length=4.6mm, Manufacturer Part Number=SMBJ6.0CA-TR, Max Reverse Leakage Current=20uA, Min Breakdown Voltage=6.7V, Mount="Surface Mount", Number of Bidirectional Channels=1, Number of Elements=1, Number of Pins=2, Packaging="Tape and Reel", Polarity=Bidirectional, Power Dissipation=600W, Pricing 1="1=0,44000, 10=0,35800, 100=0,24390, 500=0,18296, 1000=0,13721 (USD)", Radiation Hardening=No, REACH SVHC="No SVHC", Reverse Breakdown Voltage=6.7V, Reverse Standoff Voltage=6V, RoHS=Yes, RoHS Compliant=Yes, Series="SMBJ, TRANSIL™", Stock 1=1863, Supplier 1=Digi-Key, Supplier 2=Mouser, Supplier 3="Arrow Electronics", Supplier Part Number 2=511-SMBJ6.0CA-TR, Supplier Part Number 3=SMBJ6.0CA-TR, Test Current=10mA, Voltage Rating (DC)=6V, Width=3.95mm
J1 J4 J5 J8: "TERM BLOCK PLUG 2POS STR 3.81MM", Color=Green, Current=8A, Flammability Rating="UL94 V-0", Manufacturer="Phoenix Contact", Package Quantity=100, Supplier Part Number 1=277-11343-ND, Voltage=300V, Voltage Rating=160V, Category="Terminal Blocks", ComponentLink1Description=https://datasheet.ciiva.com/29706/5447861-29706032.pdf?src-supplier=Digi-Key, ComponentLink1URL=https://datasheet.ciiva.com/29706/5447861-29706032.pdf?src-supplier=Digi-Key, Connector Type=Screw, Contact Plating=Tin, Current Rating=8A, Housing Material=Polyamide, Manufacturer Part Number=5447861, Mount="Free Hanging", Number of Levels=1, Number of Pins=2, Number of Positions=2, Number of Positions Per Level=2, Packaging=Bulk, Pitch=0.15inch, Pricing 1="1=2,56000, 10=2,45300, 50=2,38620, 100=2,23000, 250=2,05160, 500=1,89550, 1000=1,80631, 2500=1,77954 (USD)", RoHS=Yes, Stock 1=30203, Supplier 1=Digi-Key, Supplier 2=Mouser, Supplier Part Number 2=651-5447861, Termination=Screw, Wire Gauge (Max)=30AWG, Wire Gauge (Min)=14AWG
J2 J3 J6 J7: "TERM BLOCK HDR 2POS 90DEG 3.81MM", Color=Green, Current=8A, Flammability Rating="UL94 V-0", Manufacturer="Phoenix Contact", Package Quantity=100, Supplier Part Number 1=277-11313-ND, Voltage=300V, Voltage Rating=160V, Category="Terminal Blocks", ComponentLink1Description=https://datasheet.ciiva.com/29682/5444262-29682658.pdf?src-supplier=Digi-Key, ComponentLink1URL=https://datasheet.ciiva.com/29682/5444262-29682658.pdf?src-supplier=Digi-Key, Contact Plating=Tin, Current Rating=8A, Housing Material=Polyamide, Length=9.2mm, Manufacturer Part Number=5444262, Mount="Through Hole", Number of Levels=1, Number of Positions=2, Number of Positions Per Level=2, Packaging=Bulk, Pitch=0.15inch, Pricing 1="1=0,87000, 10=0,83600, 50=0,81320, 100=0,76000, 250=0,69920, 500=0,64600, 1000=0,61560, 2500=0,60648 (USD)", RoHS=Yes, RoHS Compliant=Yes, Stock 1=66186, Supplier 1=Digi-Key, Supplier 2=Mouser, Supplier Part Number 2=651-5444262, Termination=Solder
L1: "FIXED IND 4.7UH 4A 23 MOHM SMD", Case/Package=Nonstandard, Current Rating=4.5A, DC Resistance (DCR)=27.6mR, Inductance Tolerance=20%, Manufacturer=Murata, Manufacturer Part Number=1255AY-4R7M=P3, Max DC Current=4A, Max Operating Temperature=85°C, Min Operating Temperature=-40°C, Supplier Part Number=490-10812-1-ND, Test Frequency=100kHz, Category="Fixed Inductors", ComponentLink1Description=http://search.murata.co.jp/Ceramy/image/img/P02/J(E)TE243B-0037_DG6045C_reference.pdf?src-supplier=Digikey, ComponentLink1URL=http://search.murata.co.jp/Ceramy/image/img/P02/J(E)TE243B-0037_DG6045C_reference.pdf?src-supplier=Digikey, ComponentLink2Description=http://www.toko.co.jp/products/pdf/inductors/dg6045c.pdf?src-supplier=Digikey, ComponentLink2URL=http://www.toko.co.jp/products/pdf/inductors/dg6045c.pdf?src-supplier=Digikey, ComponentLink3Description=http://www.toko.co.jp/products/pdf/inductors/dg6045c.pdf?src-supplier=Avnet, ComponentLink3URL=http://www.toko.co.jp/products/pdf/inductors/dg6045c.pdf?src-supplier=Avnet, Core Material=Ferrite, ESR=27.6mR, Height=4.5mm, Height - Seated (Max)=0.177inch, Length=0.248inch, Mounting Technology="Surface Mount", Packaging="Cut Tape", Pricing="1=0,37, 10=0,308, 100=0,2533 (USD)", RMS Current (Irms)=4A, RoHS=Yes, RoHS Compliant=Yes, Saturation Current=4.5A, Series=DG6045C, Shielding=Shielded, Stock=78528, Supplier=Digikey, Supplier 1=Digikey, Supplier Part Number 1=490-10812-1-ND, Tolerance=20%, Width=0.248inch
R1 R8: "RES 100K OHM 1% 1/8W 0805", Case Code (Imperial)=0805, Case Code (Metric)=2012, Manufacturer="TE Connectivity", Max Operating Temperature=85°C, Max Power Dissipation=125mW, Min Operating Temperature=-55°C, Operating Supply Voltage=150V, Supplier Part Number=A129773CT-ND, Supplier Part Number 1=279-CRGCQ0805F100K, Temperature Coefficient=100ppm/°C, Tolerance=1%, Case/Package=0805, Category="Chip SMD Resistors", ComponentLink1Description=https://www.te.com/commerce/DocumentDelivery/DDEController?Action=srchrtrv&DocNm=1773204-3&DocType=DS&DocLang=English&src-supplier=Digikey, ComponentLink1URL=https://www.te.com/commerce/DocumentDelivery/DDEController?Action=srchrtrv&DocNm=1773204-3&DocType=DS&DocLang=English&src-supplier=Digikey, ComponentLink2Description=https://www.te.com/commerce/DocumentDelivery/DDEController?Action=srchrtrv&amp;DocNm=1773204-3&amp;DocType=DS&amp;DocLang=English&src-supplier=Digikey, ComponentLink2URL=https://www.te.com/commerce/DocumentDelivery/DDEController?Action=srchrtrv&amp;DocNm=1773204-3&amp;DocType=DS&amp;DocLang=English&src-supplier=Digikey, ComponentLink3Description=https://4donline.ihs.com/images/VipMasterIC/IC/TYEL/TYEL-S-A0004929575/TYEL-S-A0004929575-1.pdf?hkey=52A5661711E402568146F3353EA87419&src-supplier=Farnell, ComponentLink3URL=https://4donline.ihs.com/images/VipMasterIC/IC/TYEL/TYEL-S-A0004929575/TYEL-S-A0004929575-1.pdf?hkey=52A5661711E402568146F3353EA87419&src-supplier=Farnell, ComponentLink4Description=https://datasheet.octopart.com/CRGCQ0805F100K-TE-Connectivity-datasheet-114679081.pdf?src-supplier=Master+Electronics, ComponentLink4URL=https://datasheet.octopart.com/CRGCQ0805F100K-TE-Connectivity-datasheet-114679081.pdf?src-supplier=Master+Electronics, Core Architecture=ARM, Features="Moisture Resistant,Automotive AEC-Q200", Height=650um, Interface=I2C,SPI,IrDA,UART,USART, Manufacturer Part Number=CRGCQ0805F100K, Memory Format=FLASH, Memory Size=64KB, Number of I/Os=47, Number of Terminations=2, Oscillator Type=Internal, Packaging="Cut Tape", Peripherals="Brown-out Detect/Reset,POR,PWM,WDT,DMA", Power Rating=125mW, Pricing="1=0,1, 10=0,033, 50=0,0212, 100=0,0177, 500=0,01228, 1000=0,01063 (USD)", RoHS=Yes, RoHS Compliant=Yes, Series=CRGCQ, Stock=241081, Supplier=Digikey, Supplier 1=Mouser, Supplier 2=Digikey, Supplier Part Number 2=A129773CT-ND, Voltage Rating=150V, Voltage Rating (DC)=150V
R2 R6 R10 R14 R15: "RES 470 OHM 5% 1/8W 0805", Case Code (Imperial)=0805, Case Code (Metric)=2012, Manufacturer="TE Connectivity", Max Operating Temperature=155°C, Max Power Dissipation=125mW, Min Operating Temperature=-55°C, Operating Supply Voltage=150V, Ratings=AEC-Q200, Supplier Part Number=A130132CT-ND, Supplier Part Number 1=279-CRGCQ0805J470R, Temperature Coefficient=100ppm/°C, Tolerance=5%, Case/Package=0805, Category="Chip SMD Resistors", ComponentLink1Description=http://datasheet.octopart.com/CRGCQ0805J470R-TE-Connectivity-datasheet-114679081.pdf?src-supplier=Digikey, ComponentLink1URL=http://datasheet.octopart.com/CRGCQ0805J470R-TE-Connectivity-datasheet-114679081.pdf?src-supplier=Digikey, ComponentLink2Description=http://datasheet.octopart.com/CRGCQ0805J470R-TE-Connectivity-datasheet-114679081.pdf?src-supplier=Farnell, ComponentLink2URL=http://datasheet.octopart.com/CRGCQ0805J470R-TE-Connectivity-datasheet-114679081.pdf?src-supplier=Farnell, ComponentLink3Description=http://datasheet.octopart.com/CRGCQ0805J470R-TE-Connectivity-datasheet-114679081.pdf?src-supplier=Avnet, ComponentLink3URL=http://datasheet.octopart.com/CRGCQ0805J470R-TE-Connectivity-datasheet-114679081.pdf?src-supplier=Avnet, ComponentLink4Description=http://datasheet.octopart.com/CRGCQ0805J470R-TE-Connectivity-datasheet-114679081.pdf?src-supplier=Mouser, ComponentLink4URL=http://datasheet.octopart.com/CRGCQ0805J470R-TE-Connectivity-datasheet-114679081.pdf?src-supplier=Mouser, ComponentLink5Description=http://datasheet.octopart.com/CRGCQ0805J470R-TE-Connectivity-datasheet-114679081.pdf?src-supplier=Newark, ComponentLink5URL=http://datasheet.octopart.com/CRGCQ0805J470R-TE-Connectivity-datasheet-114679081.pdf?src-supplier=Newark, ComponentLink6Description=http://datasheet.octopart.com/CRGCQ0805J470R-TE-Connectivity-datasheet-114679081.pdf?src-supplier=Onlinecomponents.com, ComponentLink6URL=http://datasheet.octopart.com/CRGCQ0805J470R-TE-Connectivity-datasheet-114679081.pdf?src-supplier=Onlinecomponents.com, ComponentLink7Description=https://datasheet.octopart.com/CRGCQ0805J470R-TE-Connectivity-datasheet-114679081.pdf?src-supplier=Master+Electronics, ComponentLink7URL=https://datasheet.octopart.com/CRGCQ0805J470R-TE-Connectivity-datasheet-114679081.pdf?src-supplier=Master+Electronics, ComponentLink8Description=http://datasheet.octopart.com/CRGCQ0805J470R-TE-Connectivity-datasheet-114679081.pdf?src-supplier=Heilind+Electronics, ComponentLink8URL=http://datasheet.octopart.com/CRGCQ0805J470R-TE-Connectivity-datasheet-114679081.pdf?src-supplier=Heilind+Electronics, ComponentLink9Description=http://datasheet.octopart.com/CRGCQ0805J470R-TE-Connectivity-datasheet-114679081.pdf?src-supplier=Sager+Electronics, ComponentLink9URL=http://datasheet.octopart.com/CRGCQ0805J470R-TE-Connectivity-datasheet-114679081.pdf?src-supplier=Sager+Electronics, ComponentLink10Description=http://datasheet.octopart.com/CRGCQ0805J470R-TE-Connectivity-datasheet-114679081.pdf?src-supplier=Interstate+Connecting+Components, ComponentLink10URL=http://datasheet.octopart.com/CRGCQ0805J470R-TE-Connectivity-datasheet-114679081.pdf?src-supplier=Interstate+Connecting+Components, ComponentLink11Description=http://datasheet.octopart.com/CRGCQ0805J470R-TE-Connectivity-datasheet-114679081.pdf?src-supplier=Electro+Sonic, ComponentLink11URL=http://datasheet.octopart.com/CRGCQ0805J470R-TE-Connectivity-datasheet-114679081.pdf?src-supplier=Electro+Sonic, Features="Moisture Resistant,Automotive AEC-Q200", Height=650um, Manufacturer Part Number=CRGCQ0805J470R, Number of Terminations=2, Packaging="Cut Tape", Power Rating=125mW, Pricing="1=0,1, 10=0,026, 50=0,0162, 100=0,0137, 500=0,00942, 1000=0,00813 (USD)", RoHS=Yes, RoHS Compliant=Yes, Series=CRGCQ, Stock=837845, Supplier=Digikey, Supplier 1=Mouser, Supplier 2=Digikey, Supplier Part Number 2=A130132CT-ND, Voltage Rating=150V, Voltage Rating (DC)=150V
R3 R7 R16: "RES 10K OHM 1% 1/8W 0805", Case Code (Imperial)=0805, Case Code (Metric)=2012, Manufacturer=Yageo, Max Operating Temperature=155°C, Max Power Dissipation=125mW, Min Operating Temperature=-55°C, Package Quantity=1, Resistance Tolerance=1%, Resistor Type="Thick Film", Supplier Part Number=311-10.0KCRCT-ND, Temperature Coefficient=100ppm/°C, Voltage Rating=150V, Case/Package=0805, Category="Chip SMD Resistors", Construction=Rectangular, Depth=1.25mm, Features="Moisture Resistant", Height=0.024inch, Lead Free="Lead Free", Length=0.079inch, Manufacturer Part Number=RC0805FR-0710KL, Military Standard=Not, Number of Terminations=2, Packaging="Tape and Reel", Power Rating=125mW, Pricing="1=0,1, 10=0,027, 50=0,017, 100=0,0142, 500=0,00976, 1000=0,00844 (USD)", Reach SVHC Compliant=Unknown, RoHS=Yes, RoHS Compliant=Yes, Series=RC, Stock=2107948, Supplier=Digikey, Supplier 1=Digikey, Supplier 2=Mouser, Supplier 3=Digikey, Supplier Part Number 1=311-10.0KCRCT-ND, Supplier Part Number 2=603-RC0805FR-0710KL, Supplier Part Number 3=541-3976-1-ND, Technology="THICK FILM", Termination=SMD/SMT, Tolerance=1%, Voltage Rating (AC)=150V, Width=0.049inch
R4: "RES 1K OHM 1% 1/8W 0805", Case Code (Imperial)=0805, Case Code (Metric)=2012, Manufacturer=Yageo, Max Operating Temperature=155°C, Max Power Dissipation=125mW, Min Operating Temperature=-55°C, Package Quantity=1, Resistance Tolerance=1%, Resistor Type="Thick Film", Supplier Part Number=311-1.00KCRCT-ND, Temperature Coefficient=100ppm/°C, Voltage Rating=150V, Case/Package=0805, Category="Chip SMD Resistors", ComponentLink1Description=https://datasheet.ciiva.com/2456/pyu-r-int-thick-7-2456975.pdf?src-supplier=Digikey, ComponentLink1URL=https://datasheet.ciiva.com/2456/pyu-r-int-thick-7-2456975.pdf?src-supplier=Digikey, ComponentLink2Description=https://datasheet.ciiva.com/2456/pyu-r-int-thick-7-2456976.pdf?src-supplier=Digikey, ComponentLink2URL=https://datasheet.ciiva.com/2456/pyu-r-int-thick-7-2456976.pdf?src-supplier=Digikey, ComponentLink3Description=https://datasheet.ciiva.com/2456/pyu-r-int-thick-7-2456977.pdf?src-supplier=Digikey, ComponentLink3URL=https://datasheet.ciiva.com/2456/pyu-r-int-thick-7-2456977.pdf?src-supplier=Digikey, ComponentLink4Description=https://datasheet.ciiva.com/16850/rc0805-16850409.pdf?src-supplier=Future+Electronics, ComponentLink4URL=https://datasheet.ciiva.com/16850/rc0805-16850409.pdf?src-supplier=Future+Electronics, ComponentLink5Description=https://datasheet.ciiva.com/46385/444164-46385020.pdf?src-supplier=Element14, ComponentLink5URL=https://datasheet.ciiva.com/46385/444164-46385020.pdf?src-supplier=Element14, ComponentLink6Description=https://datasheet.ciiva.com/7941/1686128-7941719.pdf?src-supplier=Element14, ComponentLink6URL=https://datasheet.ciiva.com/7941/1686128-7941719.pdf?src-supplier=Element14, Construction=Rectangular, Depth=1.25mm, Features="Moisture Resistant", Height=0.024inch, Lead Free="Lead Free", Length=0.079inch, Manufacturer Part Number=RC0805FR-071KL, Military Standard=Not, Number of Terminations=2, Packaging="Tape and Reel", Pins=2, Power Rating=125mW, Pricing="1=0,1, 10=0,025, 50=0,016, 100=0,0133, 500=0,00912, 1000=0,00787 (USD)", Reach SVHC Compliant=No, RoHS=Yes, RoHS Compliant=Yes, Series=RC, Stock=2276979, Supplier=Digikey, Supplier 1=Digikey, Supplier 2=Mouser, Supplier Part Number 1=311-1.00KCRCT-ND, Supplier Part Number 2=603-RC0805FR-071KL, Termination=SMD/SMT, Tolerance=1%, Voltage Rating (AC)=150V, Voltage Rating (DC)=150V, Width=0.049inch
R5: "RES SMD 2K OHM 1% 1/8W 0805", Case Code (Imperial)=0805, Case Code (Metric)=2012, Manufacturer=Panasonic, Max Operating Temperature=155°C, Max Power Dissipation=125mW, Min Operating Temperature=-55°C, Package Quantity=1, Resistance Tolerance=1%, Resistor Type="Thick Film", Supplier Part Number=P2.00KCCT-ND, Supplier Part Number 1=667-ERJ-6ENF2001V, Temperature Coefficient=100ppm/°C, Voltage Rating=150V, Case/Package=0805, Category="Chip SMD Resistors", Construction=Rectangular, Contact Plating=Tin, Depth=1.25mm, Features="Automotive AEC-Q200", Height=0.6mm, Lead Free="Lead Free", Length=2mm, Manufacturer Part Number=ERJ-6ENF2001V, Military Standard=Not, Mounting Technology="Surface Mount", Number of Terminations=2, Packaging="Tape and Reel", Power Rating=125mW, Pricing="1=0,11, 10=0,053, 50=0,0344, 100=0,0292, 500=0,02058, 1000=0,01792 (USD)", Radiation Hardening=No, Reach SVHC Compliant=No, RoHS=Yes, RoHS Compliant=Yes, Series=ERJ, Stock=369929, Supplier=Digikey, Supplier 1=Mouser, Supplier 2=Digikey, Supplier 3=Digikey, Supplier Part Number 2=P2.00KCCT-ND, Supplier Part Number 3=P2.00KCCT-ND, Technology="THICK FILM", Termination=SMD/SMT, Tolerance=1%, Voltage Rating (DC)=150V, Weight=0.000194oz, Width=1.2mm
R9: "RES 1M OHM 1% 1/8W 0805", Case Code (Imperial)=0805, Case Code (Metric)=2012, Case/Package=Molded, Manufacturer=Yageo, Max Operating Temperature=155°C, Min Operating Temperature=-55°C, Power Rating=125mW, Resistance Tolerance=1%, Resistor Type="Thick Film", Supplier Part Number=311-1.00MCRCT-ND, Temperature Coefficient=250ppm/°C, Voltage Rating=150V, Category="Chip SMD Resistors", ComponentLink1Description=https://datasheet.ciiva.com/17419/rc0805-17419909.pdf?src-supplier=Future+Electronics, ComponentLink1URL=https://datasheet.ciiva.com/17419/rc0805-17419909.pdf?src-supplier=Future+Electronics, Construction=Rectangular, Depth=1.25mm, Lead Free="Lead Free", Length=2mm, Manufacturer Part Number=RC0805FR-071ML, Military Standard=Not, Packaging="Tape and Reel", Pricing="1=0,1, 10=0,026, 50=0,0162, 100=0,0134, 500=0,00906, 1000=0,00778 (USD)", Reach SVHC Compliant=Unknown, RoHS=Yes, RoHS Compliant=Yes, Stock=145027, Supplier=Digikey, Supplier 1=Digikey, Supplier 2=Mouser, Supplier Part Number 1=311-1.00MCRCT-ND, Supplier Part Number 2=603-RC0805FR-071ML, Tolerance=1%, Voltage Rating (AC)=150V